# EAGLE board PCB PUMP (EAGLE 9.5.1)
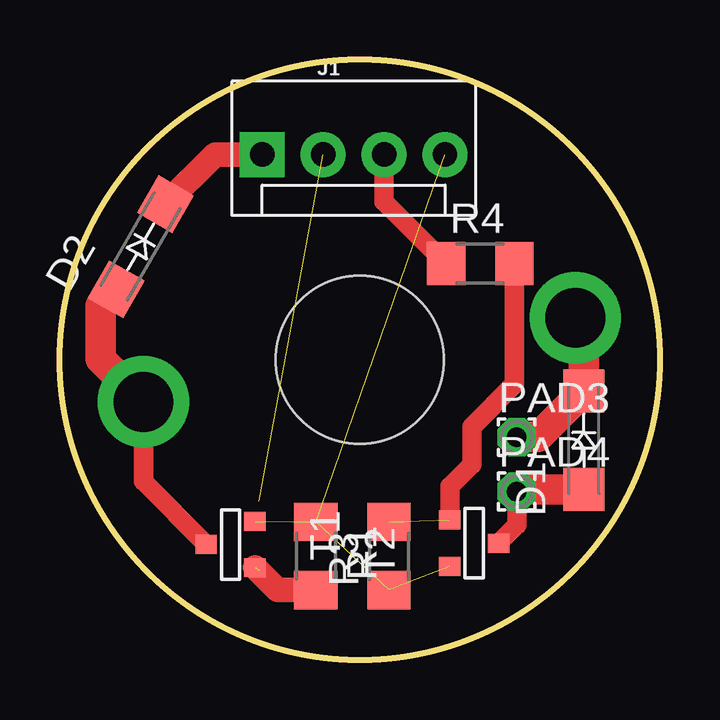
[diagram p0: board, top side]
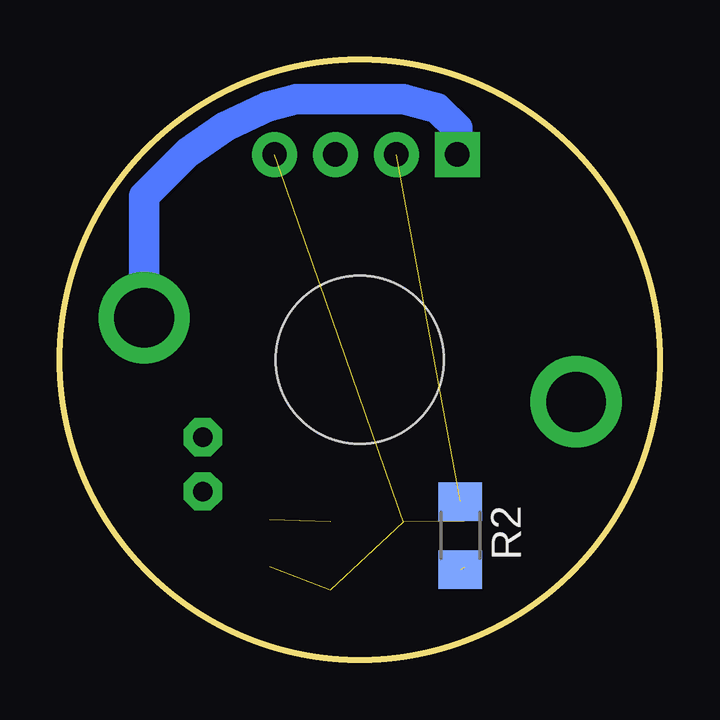
[diagram p1: board, bottom side, seen from below]

Size 25 x 25 mm. Coordinates in mm from the lower left corner, seen from the top.
Outline: circle at 12.5,12.5 radius 12.5
Copper layers (1*16): Top 0.035mm / dielectric 1.5mm / Bottom 0.035mm
Design rules "default *": minimum track width 6mil, minimum drill 0.35mm, track to track 6mil, track to pad 6mil, pad to pad 6mil, via to via 6mil, smd to smd 6mil, copper to edge 20mil, drill to drill 6mil, minimum pad ring 10mil, minimum via ring 8mil, stop-mask expansion 4mil, vias tented up to drill 0mil, thermal gap 10mil
Holes 7 mm at 12.5,12.5

## Footprints (pad centres in the part's own frame; a part is rotated, then mirrored left to right if it is on the bottom)
SMA-DO214AC = smd 1.8 x 1.7: A -2.05,0; K 2.05,0
MOLEX-1X4 = drill 1.016 pad 1.88 square: 1 0,0 | drill 1.016 pad 1.88: 2 2.54,0; 3 5.08,0; 4 7.62,0
PWRPAD_2-5MM = drill 2.489 pad 3.81: P$1 0,0
1,6/0,8 = drill 0.813 pad 1.6 octagon: 1 0,0
R1206 = smd 1.6 x 1.803: 1 -1.422,0; 2 1.422,0
SOT-23 = smd 0.787 x 0.889: 1 0.025,-1.016; 2 -0.94,1.016; 3 0.991,1.016

## Placement (x,y rotation side)
D1  GF1  [SMA-DO214AC]  21.84,9.14 90 top
D2  GF1  [SMA-DO214AC]  3.37,17.21 60 top
J1  [MOLEX-1X4]  8.43,21.06 0 top
J3  PWRPAD2-5MM  [PWRPAD_2-5MM]  3.48,10.74 0 top
J4  PWRPAD2-5MM  [PWRPAD_2-5MM]  21.49,14.25 0 top
PAD3  WIREPAD1,6/0,8  [1,6/0,8]  19.05,9.27 0 top
PAD4  WIREPAD1,6/0,8  [1,6/0,8]  19.05,7.01 0 top
R1  10k  [R1206]  10.67,4.32 270 top
R2  1K  [R1206]  8.31,5.17 270 bottom
R3  10k  [R1206]  13.72,4.32 90 top
R4  1K  [R1206]  17.53,16.51 0 top
T1  [SOT-23]  7.11,4.83 270 top
T2  [SOT-23]  17.27,4.83 90 top

## Library data of the parts
D1 D2 = diode
J1 = CONNECTORS; PROD_ID: CONN-08186; SF_ID: PRT-08231
J3 J4 T1 T2 = fab
PAD3 PAD4 = wirepad
R1-R4 = rcl; SPICEPREFIX: R

## Nets
+5V: D1.K D2.K J1.1 J4.P$1 PAD3.1
EV: J1.3 R4.1
GND: J1.4 R1.1 R3.1 T1.2 T2.2
N$1: D1.A PAD4.1 T2.1
N$2: D2.A J3.P$1 T1.1
N$3: R1.2 R2.2 T1.3
N$4: R3.2 R4.2 T2.3
PUMP: J1.2 R2.1

## Tracks (layer width: path | path; a pad name or v marks a point on that pad's centre or on a via)
+5V
  Top 1.016: D2.K 6.46,21.06 8.18,21.06
  Top 1.27: J1.1 8.18,21.06 8.16,21.04 | J4.P$1 21.58,14.34 21.74,14.34 21.84,14.24 D1.K 19.92,9.27 PAD3.1
  Bottom 1.27: J1.1 8.43,22.15 9.28,23 10.67,23.37 15.16,23.37 16.34,23.05 18.11,22.23 19.67,21.14 21.49,19.32 J4.P$1
EV
  Top 0.813: R4.1 13.51,19.1 J1.3
GND  (4 unrouted)
N$1
  Top 0.813: T2.1 19.05,5.61 PAD4.1
  Top 1.27: D1.A 19.13,7.09 PAD4.1
N$2
  Top 0.813: T1.1 3.48,7.42 J3.P$1
  Top 1.27: D2.A 2.35,15.36 1.7,14.76 1.7,12.52 J3.P$1
N$3  (1 unrouted)
  Top 1.016: T1.3 9.07,2.9 R1.2
N$4  (1 unrouted)
  Top 0.813: T2.3 16.26,7.22 17.17,8.13 17.17,9.7 18.95,11.48 R4.2
PUMP  (1 unrouted)